# EAGLE board soic20 (EAGLE 6.6.0)
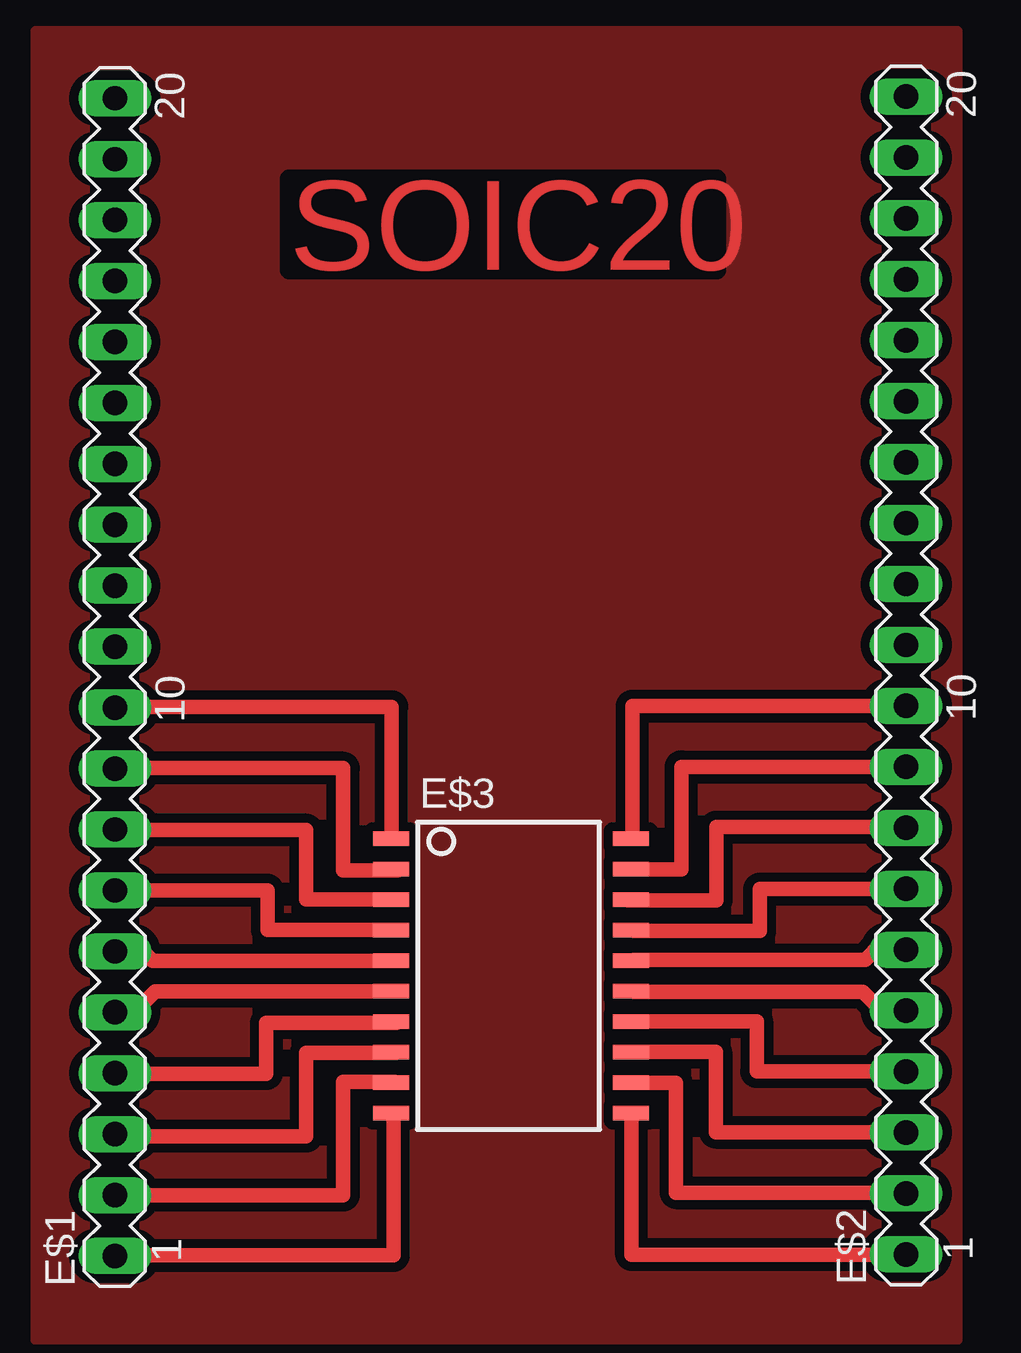
[diagram p0: board, top side]

No outline drawn. Coordinates in mm, seen from the top.
Copper layers (1*16): Top 0.035mm / dielectric 1.5mm / Bottom 0.035mm
Design rules "default *": minimum track width 10mil, minimum drill 24mil, track to track 15mil, track to pad 15mil, pad to pad 15mil, via to via 15mil, smd to smd 15mil, copper to edge 40mil, drill to drill 8mil, minimum pad ring 10mil, minimum via ring 8mil, stop-mask expansion 4mil, vias tented up to drill 0mil, thermal gap 10mil

## Footprints (pad centres in the part's own frame; a part is rotated, then mirrored left to right if it is on the bottom)
MA20-1 = drill 1.016 long: 1 -24.13,0; 2 -21.59,0; 3 -19.05,0; 4 -16.51,0; 5 -13.97,0; 6 -11.43,0; 7 -8.89,0; 8 -6.35,0; 9 -3.81,0; 10 -1.27,0; 11 1.27,0; 12 3.81,0; 13 6.35,0; 14 8.89,0; 15 11.43,0; 16 13.97,0; 17 16.51,0; 18 19.05,0; 19 21.59,0; 20 24.13,0
SOIC20S = smd 0.6 x 1.5: 1 -5.715,-5; 2 -4.445,-5; 3 -3.175,-5; 4 -1.905,-5; 5 -0.635,-5; 6 0.635,-5; 7 1.905,-5; 8 3.175,-5; 9 4.445,-5; 10 5.715,-5; 11 5.715,5; 12 4.445,5; 13 3.175,5; 14 1.905,5; 15 0.635,5; 16 -0.635,5; 17 -1.905,5; 18 -3.175,5; 19 -4.445,5; 20 -5.715,5

## Placement (x,y rotation side)
E$1  [MA20-1]  4.95,35.05 90 top
E$2  [MA20-1]  37.94,35.12 90 top
E$3  [SOIC20S]  21.46,22.6 270 top

## Library data of the parts
E$1 E$2 = con-lstb
E$3 = atmel

## Tracks (layer width: path | path; a pad name or v marks a point on that pad's centre or on a via)
S$1
  Top 0.61: 4.95,10.95 16.57,10.95 16.57,16.85
S$2
  Top 0.61: 37.97,10.98 26.49,10.98 26.49,16.82
S$3
  Top 0.61: 26.44,18.14 28.35,18.14 28.35,13.56 37.97,13.56
S$4
  Top 0.61: 16.63,18.19 14.47,18.19 14.47,13.46 5,13.46
S$5
  Top 0.61: 16.7,19.39 12.93,19.39 12.93,15.91 4.91,15.91
S$6
  Top 0.61: 26.64,19.42 30,19.42 30,16.08 37.97,16.08
S$7
  Top 0.61: 26.59,20.71 31.71,20.71 31.71,18.61 37.99,18.61
S$8
  Top 0.61: 16.7,20.63 11.26,20.63 11.26,18.52 5.05,18.52
S$9
  Top 0.61: 26.59,21.94 36.13,21.94 36.95,21.12
S$10
  Top 0.61: 26.57,23.26 36.23,23.26 36.85,23.88
S$11
  Top 0.61: 26.59,24.47 31.84,24.47 31.84,26.22 37.99,26.22
S$12
  Top 0.61: 26.34,25.75 30.02,25.75 30.02,28.8 38.01,28.8
S$13
  Top 0.61: 26.65,27.04 28.57,27.04 28.57,31.31 38.04,31.31
S$14
  Top 0.61: 26.52,28.39 26.52,33.84 38.02,33.84
S$15
  Top 0.61: 16.69,21.95 6.63,21.95 5.98,21.3
S$16
  Top 0.61: 16.69,23.22 6.53,23.22 5.83,23.92
S$17
  Top 0.61: 16.49,28.31 16.49,33.81 4.95,33.81
S$18
  Top 0.61: 16.63,24.52 11.32,24.52 11.32,26.16 4.93,26.16
S$19
  Top 0.61: 16.47,25.78 12.93,25.78 12.93,28.68 4.91,28.68
S$20
  Top 0.61: 16.73,26.99 14.47,26.99 14.47,31.26 4.98,31.26
S$21
  pour Top: 1.65,7.43 1.65,61.99 40.08,61.99 40.08,7.43

## Text on the board
Top: SOIC20